# Altium PCB KinetisDIP_5.PcbDoc
Units mil, origin at the board's own origin, x right, y up, seen from the top; angles counter-clockwise.
Board outline 1404 x 710 mil, 4 copper layers (Component Side, Signal Layer 1, Signal Layer 2, Solder Side), stack 33.235 mil thick; 36 components, 70 nets, 200 pads, 68 vias.
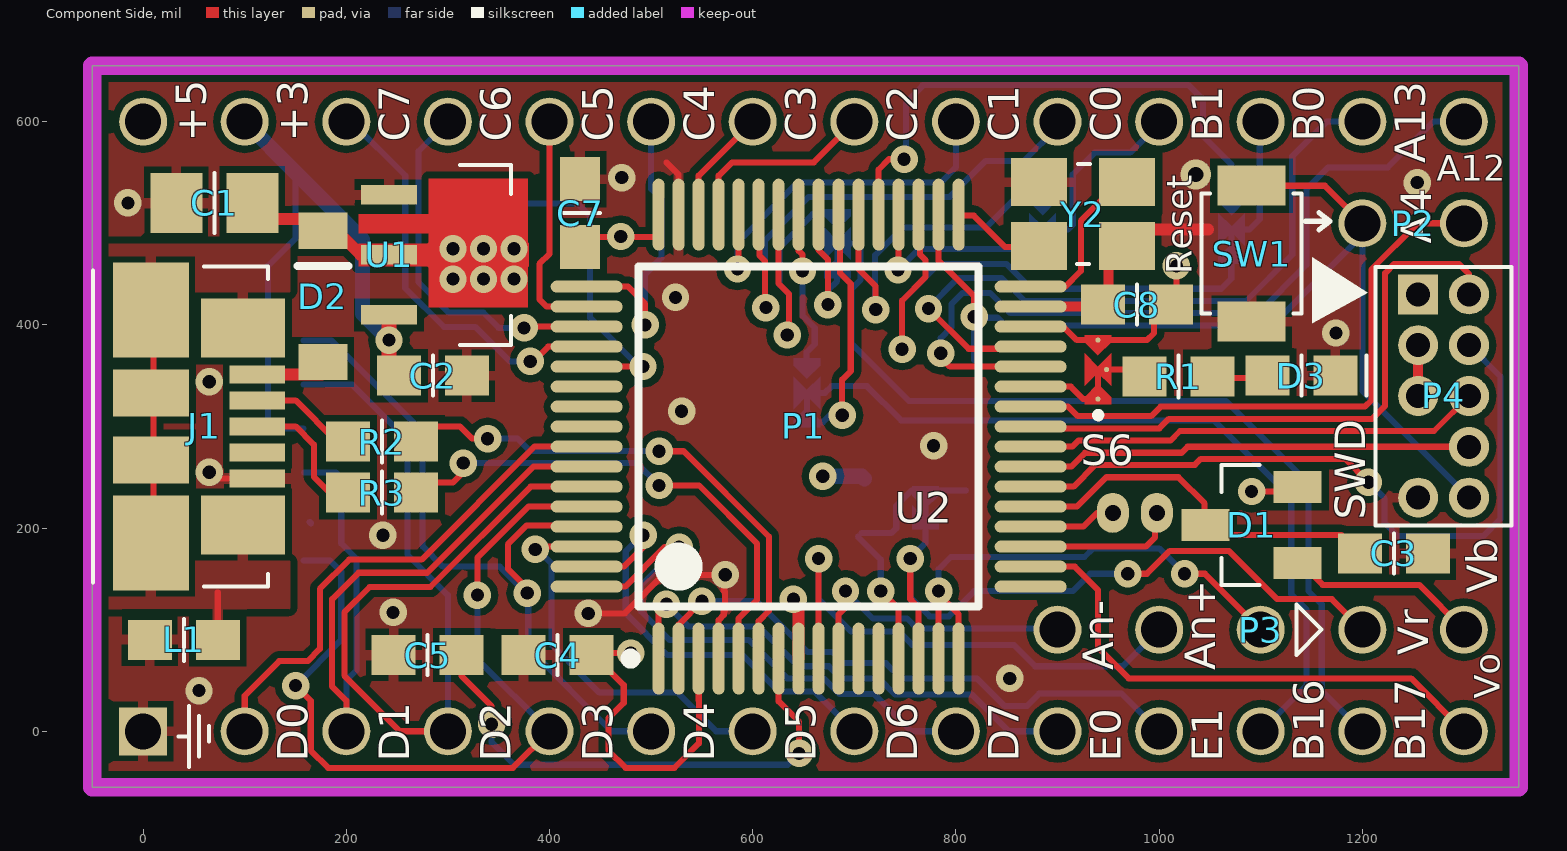
[diagram p0: Component Side view]
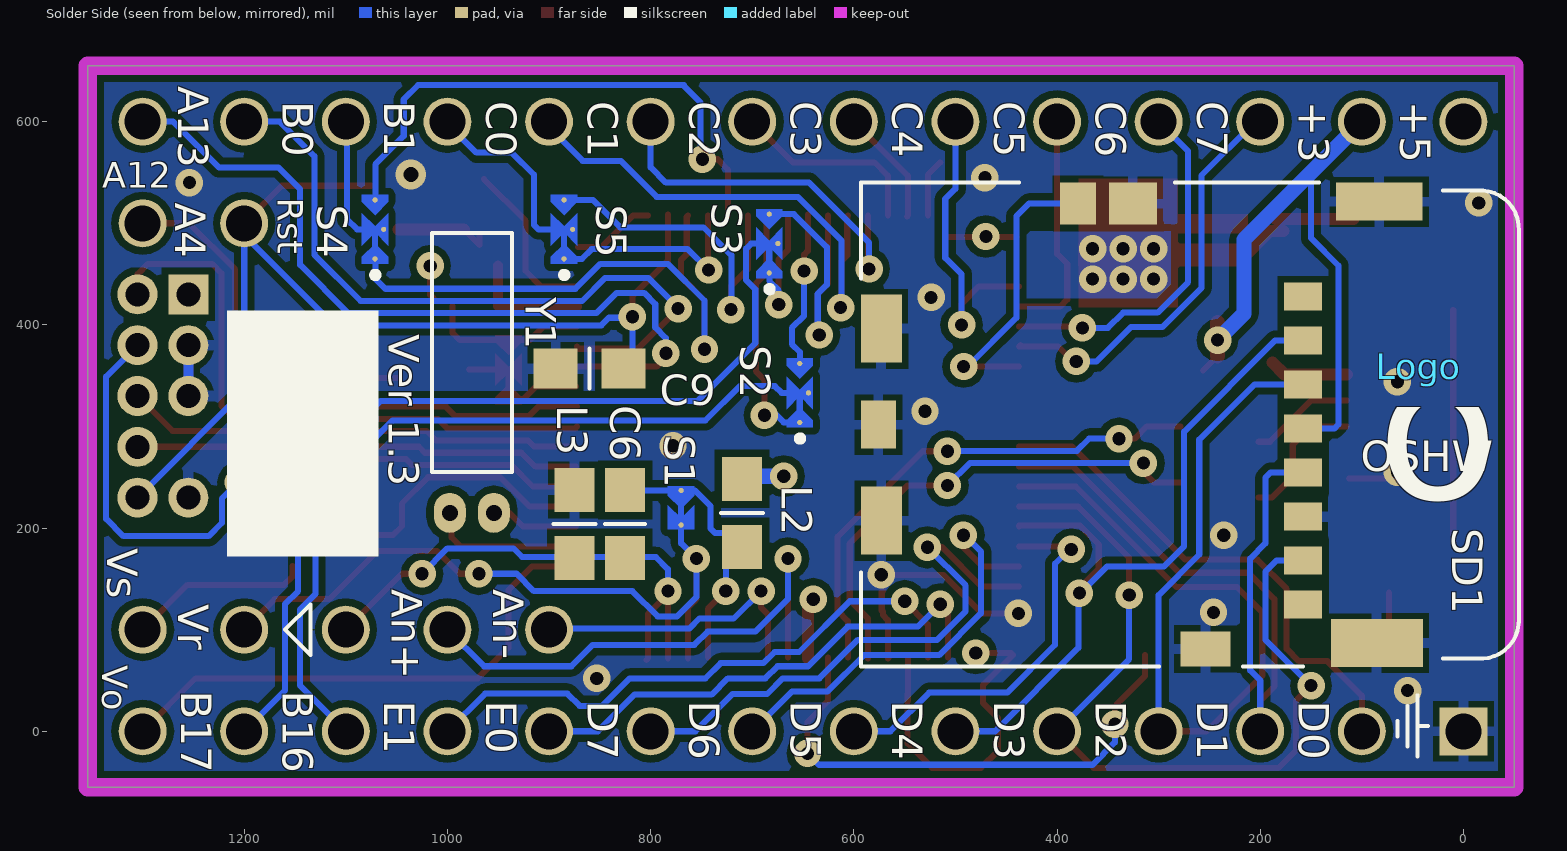
[diagram p1: Solder Side view, seen from below]
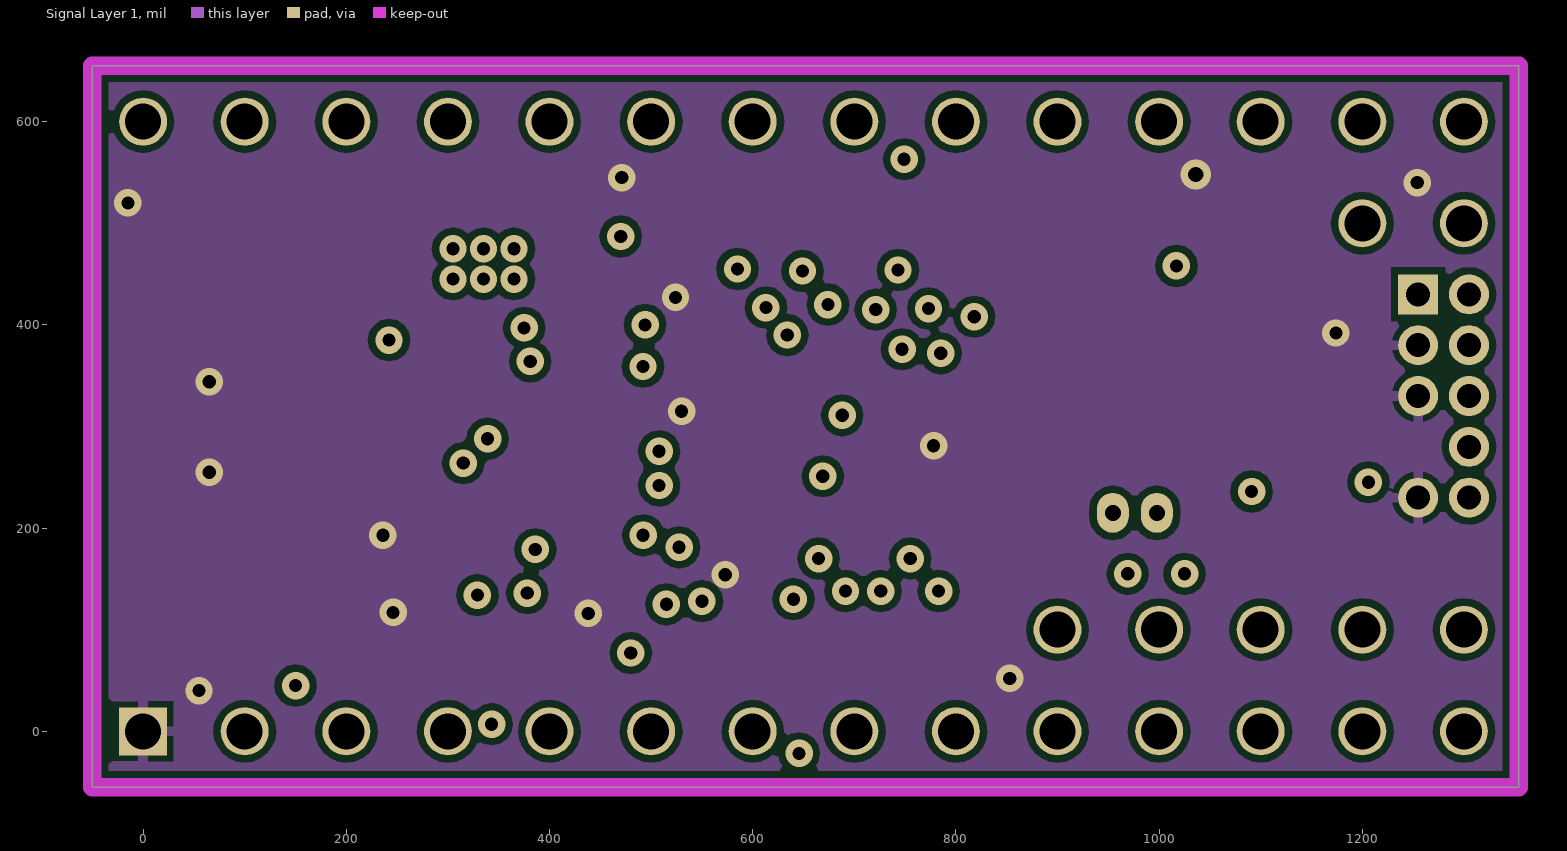
[diagram p2: Signal Layer 1]
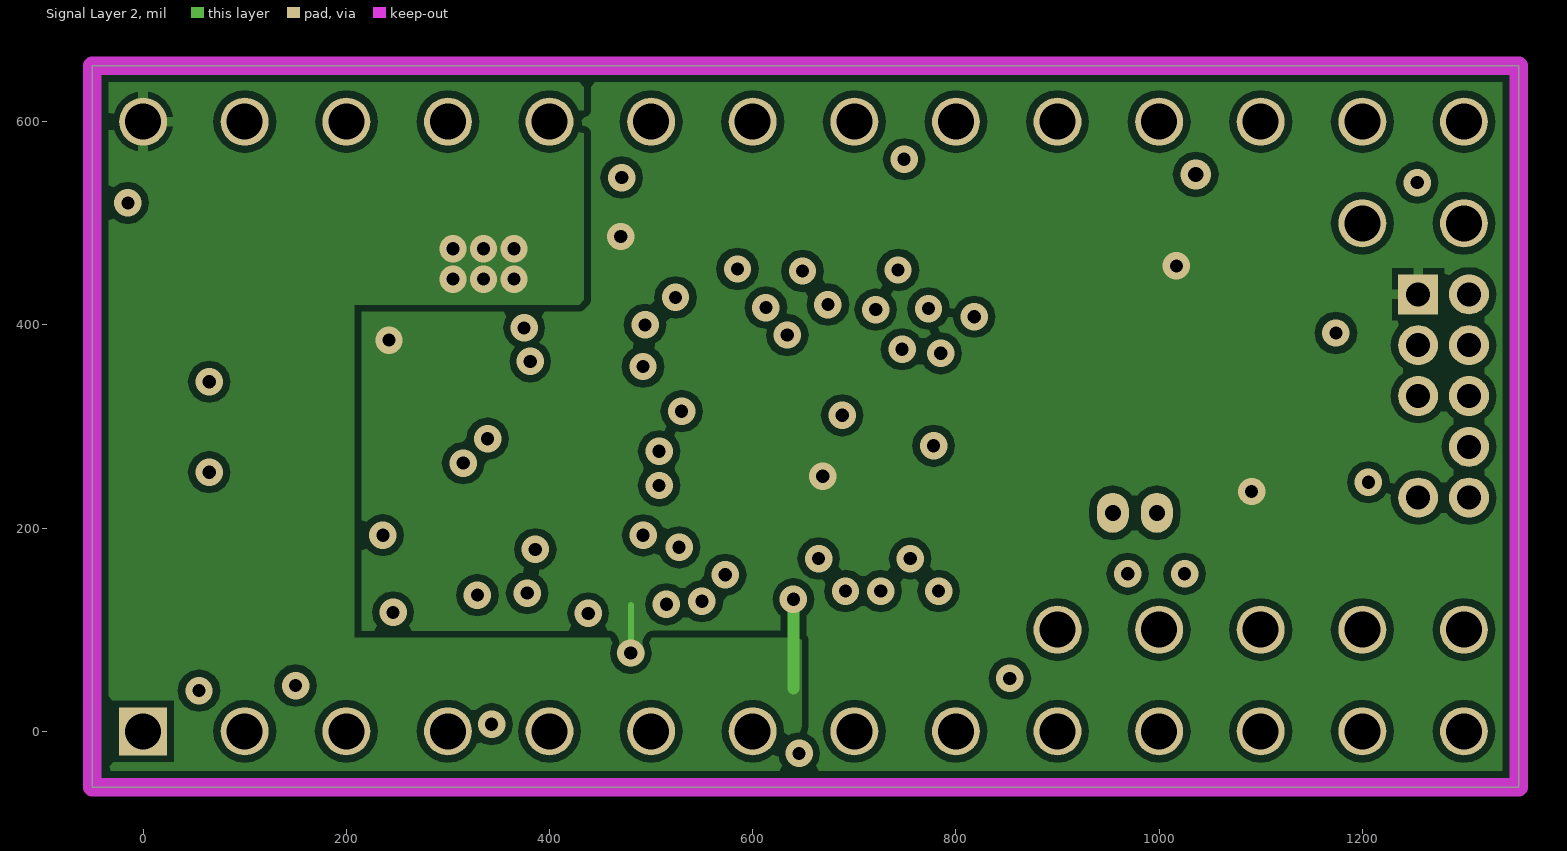
[diagram p3: Signal Layer 2]

## Layer stack, top to bottom
Top Solder: solder mask 0.4, Solder Resist, Dk 3.5
Component Side: signal copper 1.4
Dielectric 1: core 12.6, FR-4, Dk 4.8
Signal Layer 1: signal copper 1.4173
Dielectric 3: prepreg 5, Dk 4.2
Signal Layer 2: signal copper 1.4173
Dielectric 2: core 10, Dk 4.2
Solder Side: signal copper 1.4
Bottom Solder: solder mask 0.4, Solder Resist, Dk 3.5

## Board outline
-50,-55 -50,655 1354,655 1354,-55

## Design rules (kind name [scope] priority, off if disabled: settings)
Clearance Clearance_Poly [InPoly] p1: gap=7
Clearance [All] p2: gap=6
FabricationTestPointUsage TestPointUsage [All] p1: valid=0 allowmultiple=FALSE
FabricationTestpoint Testpoint [All] p1: side=3 testpointundercomponent=TRUE minsize=40 maxsize=100 preferedsize=60 minholesize=0 maxholesize=40 preferedholesize=32 testpointgrid=1 allowsidetop=TRUE allowsidebottom=TRUE usegrid=TRUE gridtolerance=0.01
HoleSize [All] p1: absolutevalues=TRUE maxlimit=100 minlimit=10 maxpercent=80.000 minpercent=20.000
MinimumAnnularRing [All] p1: minimumring=4
MinimumSolderMaskSliver [All] p1 off: minsoldermaskwidth=4
PolygonConnect PolygonConnect_Via [isVia] p1: connectstyle=Direct reliefconductorwidth=10 reliefentries=4 polygonreliefangle="90 Angle" airgapwidth=10
PolygonConnect [All] p2: connectstyle=Relief reliefconductorwidth=10 reliefentries=4 polygonreliefangle="90 Angle" airgapwidth=6
RoomDefinition KinetisDIP [InComponentClass('KinetisDIP')] p1: confinementstyle=ConfineIn formatcopy=TRUE lockcomponents=FALSE outline -95,-65 1370,-65 1370,670 -95,670
RoutingLayers [All] p1: top layer_v5=FALSE mid layer 1_v5=TRUE mid layer 2_v5=TRUE bottom layer_v5=FALSE
RoutingVias [All] p1: holewidth=13 width=27 viastyle="Through Hole" minholewidth=13 minwidth=27 maxholewidth=28 maxwidth=50
SilkToSilkClearance [All] p1: silktosilkclearance=5
SilkToSolderMaskClearance SilkscreenOverComponentPads [IsPad] p1: minsilkscreentomaskgap=5 clearancetoexposedcopper=TRUE
SolderMaskExpansion [All] p1: expansion=4
Width [All] p1: maxlimit=20 minlimit=6 preferedwidth=6
23 further rules are at their usual default settings.

## Components (designator, comment, footprint, x,y, rotation, side; value= is the part's Value field where it differs from the comment)
C1 "10uF/16V" CCNP2012-0805 70,520 r0 top
C2 "4u7F/6V3" CCNP1608-0603 285.19,350 r0 top
C3 "100nF" CCNP1608-0603 1231,175 r0 top
C4 "2u2F/10V" CCNP1608-0603 408,75 r0 top
C5 "2u2F/10V" CCNP1608-0603 280,75 r0 top
C6 "100nF" CCNP1608-0603 825,204 r270 bottom
C7 "100nF" CCNP1608-0603 430,510 r90 top
C8 "100nF" CCNP1608-0603 978,420 r180 top
C9 "100nF" CCNP1608-0603 860,357 r0 bottom
D1 "PMEG2005CT" SOT23 1091,203 r90 top
D2 "1N5819HW" SOD-123 177,428 r90 top
D3 "LED Red" LED1608-0603-RED 1140,350 r0 top
J1 "USB_MICRO_B_CONNECTOR" "MOLEX - 47346-0001" 60,300 r0 top
L1 "FB" CR1608-0603 40,90 r0 top
L2 "FB" CR1608-0603 710,215 r270 bottom
L3 "FB" CR1608-0603 875,204 r270 bottom
Logo "OSHW Logo" OSHW 44,359 r180 bottom
P1 "WDIP-28-0.6" WDIP-28-0.6 0,0 r90 top locked
P2 "Header 2" HDR1X2 1200,500 r0 top
P3 "Header 5" HDR1X5 900,100 r0 top
P4 "SWD2X5" SWD-2X5 1255,430 r270 top
R1 "470R" CR1608-0603 1019,349 r180 top
R2 "33R" CR1608-0603 235,285 r0 top
R3 "33R" CR1608-0603 235,235 r0 top
S1 "LinkClosed" SOLDERBRIDGE(CLOSED) 770,220 r270 bottom net-tie
S2 "Link3Closed" SOLDERBRIDGE3(CLOSED) 653,333 r90 bottom net-tie
S3 "Link3Closed" SOLDERBRIDGE3(CLOSED) 683,480 r90 bottom net-tie
S4 "Link3Closed" SOLDERBRIDGE3(CLOSED) 1071,494 r90 bottom net-tie
S5 "Link3Closed" SOLDERBRIDGE3(CLOSED) 885,494 r90 bottom net-tie
S6 "Link3Closed" SOLDERBRIDGE3(CLOSED) 940,356 r90 top net-tie
SD1 "SD_Socket2" "SDCARD_MICRO - MOLEX 504077-1891" 40,540 r270 bottom
SW1 "SW-PB-SMT-B3U" SW_SMT_PB2-B3U 1091,470 r270 top
U1 "MCP1702T-3302E/MB" SOT-89 242,528 r270 top
U2 "MK22FN512VLH12" TSQFP50P1200X1200-64N 655,290 r90 top
Y1 "Crystal - 32kHz" CRYSTAL_CAN 976,215 r180 bottom
Y2 "XTAL_SMT2_FA-238" "CRYSTAL_SMT - EPSON-FA-238" 925,509 r180 top

## Footprints (in the part's own frame and the unit in brackets; to place one, negate y for a bottom-side part, rotate by r counter-clockwise, add the part's x,y. Pads: shape width x height; smd on the part's side, far side on the other; paste and mask are expansions set on the pad)
CCNP1608-0603 [mm]
  rect 1.1x1 smd: 1(-0.85,0) 2(0.85,0)
  silkscreen extent 0,-0.5 0,0.5, body extent -0.8,-0.4 0.8,0.4, height 0.3
CCNP2012-0805 [mm]
  rect 1.3x1.5 smd: 1(-0.95,0) 2(0.95,0)
  silkscreen extent 0,-0.75 0,0.75, body extent -1,-0.62 1,0.63, height 0.78
CR1608-0603 [mm]
  rect 1.1x1 smd: 1(-0.85,0) 2(0.85,0)
  silkscreen extent 0,-0.53 0,0.53, body extent -0.85,-0.4 0.85,0.4, height 0.56
CRYSTAL_CAN [mm] "32kHz crystal 6x2mm cylindrical can"
  oval 0.8x1 hole 0.4: 1(-0.55,0) 2(0.55,0)
  silkscreen extent -1,1.02 1,7, body extent -1,1 1,7, height 2
"CRYSTAL_SMT - EPSON-FA-238" [mm] "Crystal SMT low profile 3.2 x 2.5"
  rect 1.4x1.2 smd: 1(-1.1,-0.8) 2(1.1,-0.8) 3(1.1,0.8) 4(-1.1,0.8)
  silkscreen extent -0.17,-1.25 0.15,1.25, body extent -1.55,-1.24 1.65,1.26, height 0.7
HDR1X2 [mm] "Connector; Header; 2 Position"
  round 1.2 hole 0.9: 1(0,0) 2(2.54,0)
HDR1X5 [mm] "Connector; Header; 5 Position"
  round 1.2 hole 0.9: 1(0,0) 2(2.54,0) 3(5.08,0) 4(7.62,0) 5(10.16,0)
LED1608-0603-RED [mm] "SMT-LED 0603"
  rect 1.1x1 smd: A(-0.85,0) K(0.85,0)
  silkscreen extent 0,-0.5 1.62,0.5, body extent -0.8,-0.4 0.8,0.4, height 0.75
"MOLEX - 47346-0001" [mm] "RECEPTACLE, MICRO USB B, BOTTOM MOUNT"
  rect 1.38x0.45 smd: D+(1.33,0) D-(1.33,0.65) G(1.33,-1.3) ID(1.33,-0.65) Vbus(1.33,1.3)
  rect 1.9x2.38 smd: S1(-1.33,2.91) S4(-1.33,-2.91)
  rect 1.9x1.18 smd: S2(-1.33,0.838) S3(-1.33,-0.838)
  rect 2.1x1.48 smd: S5(0.97,2.46) S6(0.97,-2.46)
  silkscreen extent -2.78,-4 1.6,4, body extent -3.88,-3.99 1.55,3.99, height 2.67
OSHW [mil] "OSHW Logo"
"SDCARD_MICRO - MOLEX 504077-1891" [mm] "MicroSD card socket -   MOLEX  504077-1891"
  rect 0.7x0.95 smd: 1(2.85,-2.99) 2(3.95,-2.99) 3(5.05,-2.99) 4(6.15,-2.99) 5(7.25,-2.99) 6(8.35,-2.99) 7(9.45,-2.99) 8(10.55,-2.99)
  rect 1.05x0.9 smd: 9(0.525,-8.62)
  rect 1.2x0.88 smd: 10(6.05,-13.61)
  rect 0.95x2.17 smd: 11(0.475,-1.09)
  rect 1.19x2.3 smd: 12(11.51,-1.15)
  rect 0.88x1.25 smd: 13(11.66,-5.435)
  rect 1.05x1.2 smd: 14(0.525,-7.25)
  rect 1.7x1.03 smd: 15(3.65,-13.535) 16(8.45,-13.535)
  silkscreen extent 0,-14.05 12.1,2.4, body extent 0.36,-13.71 11.74,-0.21, height 1.21
SOD-123 [mm] "SOD-123; 2 Leads; Body 2.7 x 1.6 mm, (LxW)"
  rect 0.91x1.22 smd: 1(-1.64,0) 2(1.64,0)
  silkscreen extent 0.76,-0.63 0.76,0.64, body extent -1.85,-0.8 1.85,0.8, height 1.27
SOLDERBRIDGE3(CLOSED) [mil]
  round 5 smd paste-5 mask+0: 1(-29,0.25) 3(29,0.25)
  round 5 smd paste-5 mask-5: 2(0,-8.25)
  Component Side region: -21,3.25 -3,3.25 -3,-2.75 -21,-2.75
  Component Side region: -34,13.25 -27,13.25 -14,0.25 -27,-12.75 -34,-12.75
  Component Side region: -16,13.25 -3,0.25 -16,-12.75 2,-12.75 2,13.25
  Component Side region: 16,-12.75 3,0.25 16,13.25 -2,13.25 -2,-12.75
  Component Side region: 34,-12.75 27,-12.75 14,0.25 27,13.25 34,13.25
  silkscreen extent -48,-3 -42,3
SOLDERBRIDGE(CLOSED) [mil]
  round 5 smd paste-5 mask+0: 1(-17,0) 2(17,0)
  Component Side region: -9,3 11,3 11,-3 -9,-3
  Component Side region: -21,13 -12,13 1,0 -12,-13 -21,-13
  Component Side region: -2.5,13 10.5,0 -2.5,-13 21,-13 21,13
SOT23 [mm] "SOT-23; 3 Leads; Body 3.0 x 2.3 mm, inc. leads (LxW max)"
  rect 0.8x1.2 smd: 1(-0.95,-1.15) 2(0.95,-1.15) 3(0,1.15)
  silkscreen extent -1.5,-0.2 1.5,0.75, body extent -1.5,-1.25 1.5,1.25, height 1.05
SOT-89 [mm] "SOT-89 small power package"
  rect 0.48x1.4 smd: 1(0,0) 2(1.5,0) 3(3,0)
  Component Side region: 0.9,1.27 0.9,3.175 1.213,3.488 1.787,3.488 2.1,3.175 2.1,1.27 1.78,0.95 1.78,-0.762 1.22,-0.762 1.22,0.95
  silkscreen extent -0.75,1.78 3.75,3.05, body extent -0.75,-0.5 3.75,3.5, height 1.5
SW_SMT_PB2-B3U [mm] "Miniature SMT Push Button"
  rect 1x1.7 smd: 1(-1.7,0) 2(1.7,0)
  silkscreen extent -1.5,-1.25 1.5,1.25, body extent -2,-1.25 2,1.25, height 1.6
SWD-2X5 [mm] "Connector; SWD; 2x5 Position"
  rect 1x1 hole 0.6: 1(0,0)
  round 1 hole 0.6: 2(0,1.27) 3(1.27,0) 4(1.27,1.27) 5(2.54,0) 6(2.54,1.27) 8(3.81,1.27) 9(5.08,0) 10(5.08,1.27)
  silkscreen extent -0.93,-2.65 5.77,2.33, body extent -0.63,-1.09 5.72,2.31, height 4.5
TSQFP50P1200X1200-64N [mm] "Thin QFP, 64-Leads, Body 10x10mm, Pitch 0.5mm, IPC Medium Density"
  oval 1.8x0.3 smd: 1(-5.55,3.75) 2(-5.55,3.25) 3(-5.55,2.75) 4(-5.55,2.25) 5(-5.55,1.75) 6(-5.55,1.25) 7(-5.55,0.75) 8(-5.55,0.25) 9(-5.55,-0.25) 10(-5.55,-0.75) 11(-5.55,-1.25) 12(-5.55,-1.75) 13(-5.55,-2.25) 14(-5.55,-2.75) 15(-5.55,-3.25) 16(-5.55,-3.75) 33(5.55,-3.75) 34(5.55,-3.25) 35(5.55,-2.75) 36(5.55,-2.25) 37(5.55,-1.75) 38(5.55,-1.25) 39(5.55,-0.75) 40(5.55,-0.25) 41(5.55,0.25) 42(5.55,0.75) 43(5.55,1.25) 44(5.55,1.75) 45(5.55,2.25) 46(5.55,2.75) 47(5.55,3.25) 48(5.55,3.75)
  oval 0.3x1.8 smd: 17(-3.75,-5.55) 18(-3.25,-5.55) 19(-2.75,-5.55) 20(-2.25,-5.55) 21(-1.75,-5.55) 22(-1.25,-5.55) 23(-0.75,-5.55) 24(-0.25,-5.55) 25(0.25,-5.55) 26(0.75,-5.55) 27(1.25,-5.55) 28(1.75,-5.55) 29(2.25,-5.55) 30(2.75,-5.55) 31(3.25,-5.55) 32(3.75,-5.55) 49(3.75,5.55) 50(3.25,5.55) 51(2.75,5.55) 52(2.25,5.55) 53(1.75,5.55) 54(1.25,5.55) 55(0.75,5.55) 56(0.25,5.55) 57(-0.25,5.55) 58(-0.75,5.55) 59(-1.25,5.55) 60(-1.75,5.55) 61(-2.25,5.55) 62(-2.75,5.55) 63(-3.25,5.55) 64(-3.75,5.55)
  silkscreen extent -5.67,-4.25 4.25,4.57, body extent -6.02,-6 5.98,6, height 1.6
WDIP-28-0.6 [mm] "Wide DIP foot print (0.5\")"
  rect 1.2x1.2 hole 0.9: 1(0,0)
  round 1.2 hole 0.9: 2(0,-2.54) 3(0,-5.08) 4(0,-7.62) 5(0,-10.16) 6(0,-12.7) 7(0,-15.24) 8(0,-17.78) 9(0,-20.32) 10(0,-22.86) 11(0,-25.4) 12(0,-27.94) 13(0,-30.48) 14(0,-33.02) 15(15.24,-33.02) 16(15.24,-30.48) 17(15.24,-27.94) 18(15.24,-25.4) 19(15.24,-22.86) 20(15.24,-20.32) 21(15.24,-17.78) 22(15.24,-15.24) 23(15.24,-12.7) 24(15.24,-10.16) 25(15.24,-7.62) 26(15.24,-5.08) 27(15.24,-2.54) 28(15.24,0)

## Part data
C1: library part Cap_CCNP_0805, "Capacitor SMT 0805"
C2 C3 C6 C7 C8 C9: library part Cap_CCNP_0603, "Capacitor SMT 0603"
C4 C5: library part Cap, "Capacitor"
D1: "Dual Schottky Diode (SMT)"
D2: "SCHOTTKY, 1A, 40V, SOD-123"
D3: library part LED-0603-Red, "LED 0603 Red"
J1: "USB Micro-B Connector"
L1 L2 L3: library part "Ferrite Bead_0603", "Ferrite Bead (0603)"
P1: "Wide SIP package (0.6\")"
P2: "Header, 2-Pin"
P3: "Header, 5-Pin"
P4: "SWD Connector 2x5-Pin"
R1: library part Res, "Resistor SMT"
R2 R3: library part Res, "Resistor"
SD1: "MOLEX  5040771891  CONNECTOR, MICRO SD, 1.1MM, 8 POSITION"
SW1: "Switch OMRON B3U series"
U1: "3V3 LDO regulator"
U2: "Arm Cortex M4F"
Y1: library part XTAL-32kHz_CITIZEN_CAN, "CITIZEN CFS2016"
Y2: "Crystal (EPSON  Q22FA23800065 FA-238 24 MHZ 12.0PF)"

## Via types
v1: diameter 27, hole 13, Component Side to Solder Side, tented both sides, 67 vias
v2: diameter 30, hole 15, Component Side to Solder Side, tented both sides, 1 vias

## Nets (pads, with @x,y where several pads share a name; then routed paths per layer and width w, separated by ;. In a path a pad name is that pad's centre, name@x,y a point inside that pad or via, vN(x,y) a via of type N, cw(c..) or ccw(c..) an arc to the next point about the centre after c; other vN are vias at no path point)
5V: C1.2 D2.2 P1.28 U1.2 U2.8 | length 305.4
  Component Side w11.81: C1.2@108.35,504.06 D2.2@185,504.06 ; D2.2 190.43,492.57 214.06,468.94 U1.2 ; v1(640,130) 640,132.69 645.16,127.53 U2.8
  Signal Layer 2 w11.81: 640,42 v1(640,130)
  other v1: 305,445 335,445 365,445 305,475 335,475 365,475
ADC0_DM0: P3.1 U2.10 | length 292.8
  Component Side w6: U2.10@684.53,72.48 684.53,115 691.29,121.76 v1(691.29,138)
  Solder Side w6: v1(691.29,138) 718.29,111 752,111 762,101 899,101 P3.1
ADC0_DM3: U2.12
ADC0_DP0: P3.2 U2.9 | length 514.8
  Component Side w6: U2.9@664.84,72.48 v1(664.84,170)
  Solder Side w6: v1(664.84,170) 664.84,130.16 697,98 744,98 757,85 857,85 878,64 964,64 P3.2
ADC0_DP3: U2.11
AGND: C6.2 L3.2 P3.3 U2.15 U2.16 | length 516.5
  Component Side w6: U2.15 782.95,135 802.64,115.31 U2.16@802.64,72.48 ; U2.16 U2.16@804.13,70 ; v1(1025,155) 1045,155 P3.3
  Solder Side w6: v1(782.95,138) 782.95,159.49 795,171.54 926.54,171.54 935,180 1000,180 v1(1025,155)
DACOUT: P1.14 U2.18 | length 528
  Component Side w6: U2.18@872.52,162.05 916.95,162.05 940,139 940,82 970,52 1248,52 P1.14
EXTAL: U2.33 Y2.3 | length 81.9
  Component Side w6: U2.33@802.64,507.52 817.48,507.52 848.46,476.54 Y2.3@871.69,476.54
EXTAL32: U2.20 Y1.2 | length 97.1
  Component Side w6: U2.20 925.42,201.42 939,215 Y1.2@965,215
GND: C1.1 C2.2 C3.2 C4.1 C5.1 C7.2 C8.2 C9.2 D3.K J1.G L1.1 L3.1 P1.1 P4.3 P4.5 P4.9 SD1.6 SD1.10 SD1.11 SD1.12 SD1.13 SD1.14 SD1.15 SD1.16 SW1.2 U1.1 U2.4 U2.31 U2.47 Y2.2 Y2.4 | length 650.3
  Component Side w6: v1@71.18,248.82 J1.G ; v1(438,116) 474,116 512,154 v1(573,154) ; 515,560 527.05,547.95 U2.47@527.05,507.52 ; U2.4@565.93,71.99 U2.4 ; U2.4@566.42,72.48 566.42,109.42 571.5,114.5 571.5,117.68 572.5,118.68 572.5,137.32 571.5,138.32 v1@571.5,146.43 ; Y2.4@968.31,487.5 968.31,478.5 Y2.4@983.8,494
  Component Side w9.84: U2.31@872.52,417.95 C8.2@949.49,417.95 ; C8.2@950,418.46 Y2.4@950,458.23 ; P4.5@1255,325 P4.3@1255,375
  Component Side w11.81: Y2.4@983.8,494 1048,494
  Solder Side w6: SD1.6@163.99,205.78 SD1.6@165.04,204.72
  Solder Side w9.84: P4.5@1255,325 P4.3@1255,385
  other v1: 55,40 853,52 246,117 236,193 65,255 778,281 530,315 65,344 1174,392 524,427 -15,520 1254,540 471,545
  other v2: 1036,548
NetD2_1: D2.1 J1.Vbus | length 78.3
  Component Side w11.81: J1.Vbus@114.72,351.18 176.18,351.18 D2.1@188.09,363.09
NetD3_A: D3.A R1.1 | length 60
  Component Side w6: R1.1@1049,347.54 D3.A@1109,347.54
NetJ1_D+: J1.D+ R3.1 | length 134.3
  Component Side w6: J1.D+@114.72,300 150,300 168,282 168,250.46 188.46,230 R3.1@201.54,230
NetJ1_D-: J1.D- R2.1 | length 103.6
  Component Side w6: J1.D-@114.72,325.59 150,325.59 190.59,285 R2.1
NetR1_2: R1.2 S6.2 | length 29.5
  Component Side w6: S6.2@949,356 R1.2@978.54,356
PTA4: P2.2 U2.26 | length 585.3
  Component Side w6: U2.26@872.52,319.53 910.47,319.53 919.84,310.16 992.16,310.16 1001.53,319.53 1202.53,319.53 1209,326 1209,454.56 1254.44,500 P2.2
PTA5: S6.1 U2.27 | length 71.6
  Component Side w6: U2.27 913,339.21 925.21,327 S6.1@940,327
PTA12: P1.15 U2.28 | length 790.8
  Component Side w6: v1@783,372 783,370 794.1,358.9 U2.28@872.52,358.9 ; U2.28@873.01,358.41 U2.28
  Solder Side w6: v1@781,372 v1@783,372 ; v1(785,372) 785,387 795.5,397.5 795.5,420.5 806.5,431.5 833.5,431.5 853.5,411.5 1097.5,411.5 1145,459 1145,533.58 1166.42,555 1225,555 1270,600 P1.15
PTA13: P1.16 U2.29 | length 684
  Component Side w6: v1(773,416) 812.5,376.5 870.44,376.5 U2.29@872.52,378.58
  Solder Side w6: v1(773,416) 773,417 802,446 845,446 867.5,423.5 1085.5,423.5 1131,469 1131,566 1165,600 P1.16@1188,600
PTB0: S4.1 U2.35 | length 569.6
  Component Side w6: v1(747,376) 747,424 770,447 770,464 764.5,469.5 764.5,506.29 U2.35@763.27,507.52
  Solder Side w6: v1(747,376) 747,424 783,460 849.5,460 874,435.5 1061.08,435.5 1071,445.42 1071,470
PTB0-2: P1.17 S4.2 | length 137.6
  Solder Side w6: S4.2@1062,494 1089,494 1099,504 1099,599 P1.17
PTB1: S5.1 U2.36 | length 208
  Component Side w6: v1@743.58,454 U2.36@743.58,507.52
  Solder Side w6: v1(743,454) 763.58,474.58 858,474.58 867.58,465 S5.1@885,465
PTB1-3: P1.18 S5.2 | length 198
  Solder Side w6: S5.2@876,494 910.42,494 915,498.58 915,548 936.5,569.5 971.5,569.5 1000,598 P1.18
PTB2: S4.3 U2.37 | length 552.5
  Component Side w6: U2.37@723.9,507.52 723.9,552.9 734,563 v1(749,563)
  Solder Side w6: v1(749,563) 751,565 751,619 767,635 767,636 1029,636 1043,622 1043,586 1071,558 1071,518
PTB3: S5.3 U2.38 | length 340.3
  Component Side w6: U2.38@704.21,507.52 704.21,454.79 721,438 v1(721,415)
  Solder Side w6: v1(721,415) 720.5,415.5 720.5,468.5 748,496 830,496 857,523 S5.3@885,523
PTB16: S2.1 U2.39 | length 242.9
  Component Side w6: U2.39@684.53,507.52 686,506.05 686,451 696.5,440.5 696.5,354.5 688,346 v1(688,311)
  Solder Side w6: S2.1@653,304 669,304 676,311 v1(688,311)
PTB16-18: P1.12 S2.2 | length 789
  Solder Side w6: S2.2@644,333 671,333 677.8,339.8 712.2,339.8 746,306 1053.82,306 1130,229.82 1130,135 1145,120 1145,45 P1.12
PTB17: S3.1 U2.40 | length 131
  Component Side w6: U2.40@664.84,507.52 664.84,473.56 674,464.41 v1(674,420)
  Solder Side w6: v1(674,420) 674,434 683,443 S3.1@683,453 ; 681,453 681,456
PTB17-19: P1.13 S3.2 | length 903.9
  Solder Side w6: S3.2@674,480 701,480 706,475 706,444.06 697,435.06 697,382 754,325 1066,325 1147,244 1147,138 1160,125 1160,40 P1.13
PTB18: S2.3 U2.41 | length 156.4
  Component Side w6: U2.41 645.16,472.84 649,469 v1(649,453)
  Solder Side w6: v1(649,453) 649,409 661,397 661,381 653,373 S2.3@653,362
PTB19: S3.3 U2.42 | length 282.7
  Component Side w6: U2.42@625.47,507.52 625.47,440.53 635.5,430.5 635.5,391.5 v1(634,390)
  Solder Side w6: v1(634,390) 634.5,390.5 v1@634.5,391.5 ; v1@635.5,391.5 635.5,430.5 626.5,439.5 626.5,476.5 659,509 S3.3@683,509
PTC0: P1.19 U2.43 | length 499.7
  Component Side w6: U2.43@605.79,507.52 606.5,506.81 606.5,468.5 612,463 612,418 v1(613,417)
  Solder Side w6: v1(613,417) 612,418 612,483 655,526 794,526 829.42,561.42 867,561.42 900,594.42 P1.19
PTC1: P1.20 U2.44 | length 381.8
  Component Side w6: v1(585,455) 585,450 586.1,448.9 U2.44@586.1,507.52
  Solder Side w6: v1(585,455) 585,481 644,540 785,540 800,555 P1.20
PTC2: P1.21 U2.45 | length 194.9
  Component Side w6: U2.45@566.42,507.52 566.42,546.73 579.68,560 660,560 P1.21
PTC3: P1.22 U2.46 | length 115.6
  Component Side w6: U2.46@547.49,506.77 546.73,507.52 546.73,546.73 P1.22
PTC4: P1.23 U2.49 | length 295.2
  Component Side w6: U2.49@437.48,437.64 477.36,437.64 494,421 v1(494,400)
  Solder Side w6: v1(494,400) 494,450 510,466 510,524 500,534 P1.23
PTC5: P1.24 U2.50 | length 229.5
  Component Side w6: P1.24 400,470 390,460 390,425 397.05,417.95 U2.50@437.48,417.95
PTC6: P1.25 U2.51 | length 355.1
  Component Side w6: v1@375,398.27 U2.51@437.48,398.27
  Solder Side w6: P1.25 271,571 271,442 301,412 335,412 350,397 v1(375,397)
PTC7: P1.26 U2.52 | length 410.2
  Component Side w6: v1(381,364) 384,364 398.58,378.58 U2.52@434.65,378.58 ; U2.52@434.65,378.58 437.48,378.58 436.06,380 U2.52@434.65,378.58
  Solder Side w6: P1.26 205,600 258,547 258,436.13 296.13,398 327,398 361,364 v1(381,364)
PTC8: SD1.9 U2.53 | length 292.2
  Component Side w6: U2.53@437.48,358.9 437.58,359 v1(492,359)
  Solder Side w6: SD1.9 427.67,519.33 440,507 440,407 488,359 v1(492,359)
PTC9: U2.54
PTC10: U2.55
PTC11: U2.56
PTD0: P1.2 U2.57 | length 508.7
  Component Side w6: P1.2 100,35 134,69 162,69 174,81 174,140.19 202.81,169 274,169 385.16,280.16 U2.57@437.48,280.16
PTD1: P1.3 SD1.5 U2.58 | length 739.8
  Component Side w6: P1.3 200,30 186,44 186,130 212,156 279.59,156 384.06,260.47 U2.58@437.48,260.47
  Solder Side w6: SD1.5@158.5,254.57 190,254.57 195,249.57 195,185 210,170 210,60 200,50 P1.3
PTD2: P1.4 SD1.3 U2.59 | length 906
  Component Side w6: P1.4 252.76,0 198,54.76 198,117 223,142 282.56,142 381.34,240.79 U2.59@437.48,240.79
  Solder Side w6: SD1.3 205.82,341.18 260,287 260,174 300,134 P1.4
PTD3: P1.5 SD1.7 U2.60 | length 829.3
  Component Side w6: v1(150,45) 165,30 165,-19 182,-36 364,-36 P1.5 ; v1(329,134) 329,170.97 379.13,221.1 U2.60@437.48,221.1
  Solder Side w6: v1(150,45) 195,90 195,157 184.05,167.95 SD1.7 ; v1(329,134) 329,71 P1.5
PTD4: P1.6 SD1.2 U2.61 | length 761.5
  Component Side w6: v1(378,136) 381,136 382,137 359,160 359,184 377.6,202.6 437.48,202.6 U2.61@437.48,201.42
  Solder Side w6: SD1.2 185.51,384.49 275,295 275,182 295,162 351,162 379,134 379,82 461,0 P1.6 P1.6@500,15
PTD5: P1.7 U2.62 | length 375.7
  Component Side w6: v1@396.73,181.73 U2.62@437.48,181.73
  Solder Side w6: v1(386,179) 387.93,179 402,164.93 402,85 449,38 526,38 564,0 P1.7
PTD6: P1.8 U2.63 | length 431.8
  Component Side w6: U2.63@437.48,162.05 473.19,162.05 492.13,180.98 v1@492.13,192.51
  Solder Side w6: v1(492.13,192.91) 490.91,192.91 475,177 475,116 516,75 590,75 626,39 661,39 P1.8
PTD7: P1.9 U2.64 | length 543.7
  Component Side w6: U2.64@437.48,142.36 474.36,142.36 513.1,181.1 v1(527.56,181.1)
  Solder Side w6: v1(527.56,181.1) 490,143.54 490,118 518,90 596,90 634,52 670,52 685.5,36.5 719.5,36.5 756,0 P1.9
PTE0: P1.10 U2.1 | length 485.7
  Component Side w6: U2.1@507.36,72.48 v1@507.36,121.36
  Solder Side w6: v1(515,125) 537,103 606,103 645,64 675,64 687,52 724,52 740,36 816,36 852,0 P1.10
PTE1: P1.11 U2.2 | length 578
  Component Side w6: U2.2@527.05,72.48 527.05,105.05 v1(550,128)
  Solder Side w6: v1(550,128) 604,128 654,78 678,78 689,67 731,67 746,52 820.59,52 847.59,25 870,25 882,37 963,37 P1.11
RESETB: C9.1 P2.1 P4.10 SW1.1 U2.34 | length 1050.5
  Component Side w6: U2.34 782.95,463.05 818,428 v1(818,408) ; SW1.1@1075,536.93 1163.07,536.93 P2.1
  Solder Side w6: C9.1@818,365.54 v1(818,408) 819,407 841.03,407 848.53,399.5 1111.5,399.5 1200,488 P2.1 1200,335 P4.10 P4.10@1305,235
SWD_CLK: P4.4 U2.22 | length 710.2
  Component Side w6: U2.22 915.79,240.79 937.16,262.16 1035.16,262.16 1041,268 1183.1,268 v1(1206,245.1)
  Solder Side w6: v1(1206,245.1) 1221.92,229.18 1221.92,205.08 1235,192 1319,192 1336,209 1336,349 P4.4
SWD_DIO: P4.2 U2.25 | length 605.9
  Component Side w6: U2.25@872.52,299.84 874.2,298.16 1000.16,298.16 1009.53,307.53 1209.53,307.53 1222.41,320.41 1222.41,451 1231.41,460 1295,460 1305,450 P4.2@1305,425
SWD_RX: P4.8 U2.23 | length 439.6
  Component Side w6: U2.23 913.47,260.47 927.16,274.16 1022.16,274.16 1028,280 P4.8
SWD_TX: P4.6 U2.24 | length 455.7
  Component Side w6: U2.24 914.6,280.16 920.6,286.16 1011.16,286.16 1020.53,295.53 1270.53,295.53 P4.6 ; P4.6@1302.5,332.5 P4.6@1305,335
USB_DM: R2.2 U2.6 | length 505.8
  Component Side w6: R2.2@278.46,300 311.73,300 323.73,288 v1(339,288) ; v1(507.87,275.59) 531.97,275.59 616,191.56 616,118.5 605.79,108.29 U2.6@605.79,72.48
  Solder Side w6: v1(339,288) 368.54,288 380.54,276 507.46,276 v1(507.87,275.59)
USB_DP: R3.2 U2.5 | length 504.7
  Component Side w6: R3.2@278.46,245 305,245 323.78,263.78 323.56,264 v1(315,264) ; v1(507.87,241.92) 547.08,241.92 604,185 604,129 586.1,111.1 U2.5@586.1,72.48 ; U2.5@585.92,72.48 585.92,71.68 U2.5
  Solder Side w6: v1(315,264) 485.79,264 v1(507.87,241.92)
USB_SH: J1.S1 J1.S2 J1.S3 J1.S4 J1.S5 J1.S6 L1.2 | length 275.7
  Component Side w6: J1.S4@10,185.43 10,267.01 10,332.99 J1.S1@10,414.57 ; L1.2 73.46,136.54
VBAT: C3.1 D1.3 U2.21 | length 359.6
  Component Side w6: U2.21@872.52,221.1 919.1,221.1 948,250 1019,250 1044.72,224.28 1044.72,202 1053.72,193 C3.1@1179.54,193 ; C3.1@1179.54,189 C3.1@1183.54,189
VDD: C2.1 C4.2 C7.1 C8.1 D1.2 L2.1 P1.27 P4.1 S6.3 SD1.4 U1.3 U2.3 U2.30 U2.48 | length 1383.7
  Component Side w6: C2.1@242,369.54 C2.1@256.54,355 ; C7.1@440,486.54 U2.48@507.36,486.54 ; v1(480,77) 445.46,77 443.46,75 473,45.46 473,28 458,13 458,-19 475,-36 523,-36 547,-12 U2.3@547,37 ; 546.73,30.27 U2.3 ; U2.30@872.52,398.27 905.73,398.27 919,385 940,385 988,385 995,392 C8.1@995,418.46 ; C8.1@1016,424.54 1014,426.54 1017,429.54 v1(1017,458) ; v1(1091,236) 1152.68,236 D1.2@1155.68,233
  Component Side w15: C2.1@242,369.54 U1.3@242,402
  Signal Layer 2 w6: v1(480,77) 480,124
  Solder Side w6: 150,550 150,485.32 123,458.32 123,302 127.13,297.87 SD1.4
  Solder Side w15: P1.27 150,550 216,484 216,411 v1(242,385) ; v1(669,251) 707.46,251 L2.1
  other v1: 470,487
VDDA: C6.1 L2.2 S1.1 U2.13 | length 269.2
  Component Side w6: v1(726,138) 743.58,120.42 U2.13@743.58,72.48
  Solder Side w6: L2.2@703.46,191.54 726,169 v1(726,138) ; L2.2@706.93,195 736.53,195 741.22,199.69 741.22,221.81 756.41,237 S1.1 809.84,237 C6.1@810,237.16
VOUT33: C5.2 U2.7 | length 517.3
  Component Side w6: C5.2 313.46,54.31 343,24.78 v1(343,7) ; U2.7@625.47,72.48 U2.7 625.47,29.46 645.63,9.3 v1(645.63,-21.84)
  Solder Side w6: v1(343,7) 343,-11 365,-33 634.47,-33 v1(645.63,-21.84)
VREFH: P3.4 S1.2 U2.14 | length 690.8
  Component Side w6: v1(755,170) 755,130.27 756.5,128.77 756.5,128.5 763.27,121.73 U2.14 ; v1(969,155) 988,155 1010.5,177.5 1068.63,177.5 1116.13,130 1170,130 P3.4
  Solder Side w6: S1.2 770,185 v1(755,170) 755,132 774,113 793,113 818,138 915,138 932,155 v1(969,155)
VREFOUT: U2.17
VSTBY: D1.1 P3.5 | length 179.4
  Component Side w6: D1.1@1152.48,162.6 1152.48,152.52 1161,144 1256,144 P3.5
XTAL: U2.32 Y2.1 | length 164.3
  Component Side w6: U2.32@872.52,437.64 907.64,437.64 923,453 923,502.38 Y2.1@964.09,543.46
XTAL32: U2.19 Y1.1 | length 151.3
  Component Side w6: U2.19@872.52,181.73 986.73,181.73 996,191 Y1.1@996,215
pads on no net: J1.ID SD1.1 SD1.8

## Polygon pours and split planes (outlines as drawn)
5V on Signal Layer 2 "PowerLayer-5V" (solid, remove dead copper, pour order 14): -50,649.61 208,649.61 208,92 648,92 648,-50 -50,-50
VDD on Signal Layer 2 "PowerLayer-Vdd" (solid, remove dead copper, pour order 12): 202,650 1350,650 1350,-50 202,-50
5V on Signal Layer 2 "Top Layer-usb-shield" (solid, remove dead copper, pour order 11): -40,640 440,640 440,420 -40,420
GND on Signal Layer 1 "Top Layer-No Net" (solid, remove dead copper, pour order 15): -50,650 1350,650 1350,-50 -50,-50
GND on Component Side "Top Layer-Gnd" (solid, remove dead copper, pour order 13): -50,650 1350,650 1350,-50 -50,-50 -50,650
USB_SH on Component Side "Top Layer-usb-shield" (solid, pour order 16): -50,480 145,480 145,120 -50,120
GND on Solder Side "Top Layer-usb-shield" (solid, remove dead copper, pour order 9): -50,650 1350,650 1350,-50 -50,-50
5V on Solder Side "Top Layer-usb-shield" (solid, remove dead copper, pour order 10): 288,491.9 430.2,492.04 430.2,426 304,426 302,426 288,440

## Keep-outs
Keep-Out Layer:
  the board outline again, w18

## Other copper
Component Side:
  rectangle net 5V: 281,416.88 379,544
  rectangle net 5V: 212,490 288,509

## Silkscreen, mask and mechanical layers (free items; w line width, h text height)
Top Overlay:
  lines w3.94: 35,-5 45,-5 ; 45,-35 45,25 ; 55,-25 55,15 ; 65,-10 65,5 ; 1135,75 1160,100 1135,125 1135,75
  lines w5: 1144,502 1168,502 ; 1157.27,493.41 1168,502 ; 1157.27,510.59 1168,502
  text "+5" at 62,580 h30 r90
  text "+3" at 162,580 h30 r90
  text "C7" at 262,580 h30 r90
  text "C6" at 362,580 h30 r90
  text "C5" at 462,580 h30 r90
  text "C4" at 562,580 h30 r90
  text "C3" at 662,580 h30 r90
  text "C2" at 762,580 h30 r90
  text "C1" at 862,580 h30 r90
  text "C0" at 962,580 h30 r90
  text "B1" at 1062,580 h30 r90
  text "B0" at 1162,580 h30 r90
  text "A13" at 1262,559 h30 r90
  text "A12" at 1273,542 h25
  text "A4" at 1268,480 h30 r90
  text "Reset" at 1032,450 h25 r90
  text "SWD" at 1203,208 h30 r90
  text "Vb" at 1333,136 h30 r90
  text "Vr" at 1265,75 h30 r90
  text "An-" at 955,60 h30 r90
  text "An+" at 1055,60 h30 r90
  text "Vo" at 1335,32 h25 r90
  text "D0" at 162,-30 h30 r90
  text "D1" at 262,-30 h30 r90
  text "D2" at 362,-30 h30 r90
  text "D3" at 462,-30 h30 r90
  text "D4" at 562,-30 h30 r90
  text "D5" at 662,-30 h30 r90
  text "D6" at 762,-30 h30 r90
  text "D7" at 862,-30 h30 r90
  text "E0" at 962,-30 h30 r90
  text "E1" at 1062,-30 h30 r90
  text "B16" at 1162,-30 h30 r90
  text "B17" at 1262,-30 h30 r90
Bottom Overlay:
  rectangle: 1068,172 1217,414
  lines w3.94: 35,5 45,5 ; 45,-25 45,35 ; 55,-15 55,25 ; 65,-5 65,10 ; 1135,75 1160,100 1135,125 1135,75
  text "A13" at 1265,635 h30 r90
  text "+5" at 62,620 h30 r90
  text "+3" at 162,620 h30 r90
  text "C7" at 262,620 h30 r90
  text "C6" at 362,620 h30 r90
  text "C5" at 462,620 h30 r90
  text "C4" at 562,620 h30 r90
  text "C3" at 662,620 h30 r90
  text "C2" at 762,620 h30 r90
  text "C1" at 862,620 h30 r90
  text "C0" at 962,620 h30 r90
  text "B1" at 1062,620 h30 r90
  text "B0" at 1162,620 h30 r90
  text "A12" at 1340,535 h25
  text "Rst" at 1167,525 h25 r90
  text "A4" at 1268,520 h30 r90
  text "Ver 1.3" at 1058,391 h30 r90
  text "Vs" at 1335,180 h30 r90
  text "An-" at 955,140 h30 r90
  text "An+" at 1055,140 h30 r90
  text "Vr" at 1265,125 h30 r90
  text "Vo" at 1340,65 h25 r90
  text "B16" at 1162,40 h30 r90
  text "B17" at 1262,40 h30 r90
  text "D0" at 162,30 h30 r90
  text "D1" at 262,30 h30 r90
  text "D2" at 362,30 h30 r90
  text "D3" at 462,30 h30 r90
  text "D4" at 562,30 h30 r90
  text "D5" at 662,30 h30 r90
  text "D6" at 762,30 h30 r90
  text "D7" at 862,30 h30 r90
  text "E0" at 962,30 h30 r90
  text "E1" at 1062,30 h30 r90
Bottom Solder:
  rectangle: 946,482 1007,530

## Text inside footprints (layer, text, board x,y; h text height)
Logo: Bottom Overlay "o" at -35,153 h400; Bottom Overlay "OSHW" at 101,256 h30